# Altium PCB 九键触摸面板-控制板-V2.PcbDoc
Units mm, origin at the board's own origin, x right, y up, seen from the top; angles counter-clockwise.
Board outline 54.4 x 59.2 mm, 2 copper layers (Top Layer, Bottom Layer), stack 1.571 mm thick; 72 components, 76 nets, 247 pads, 180 vias.
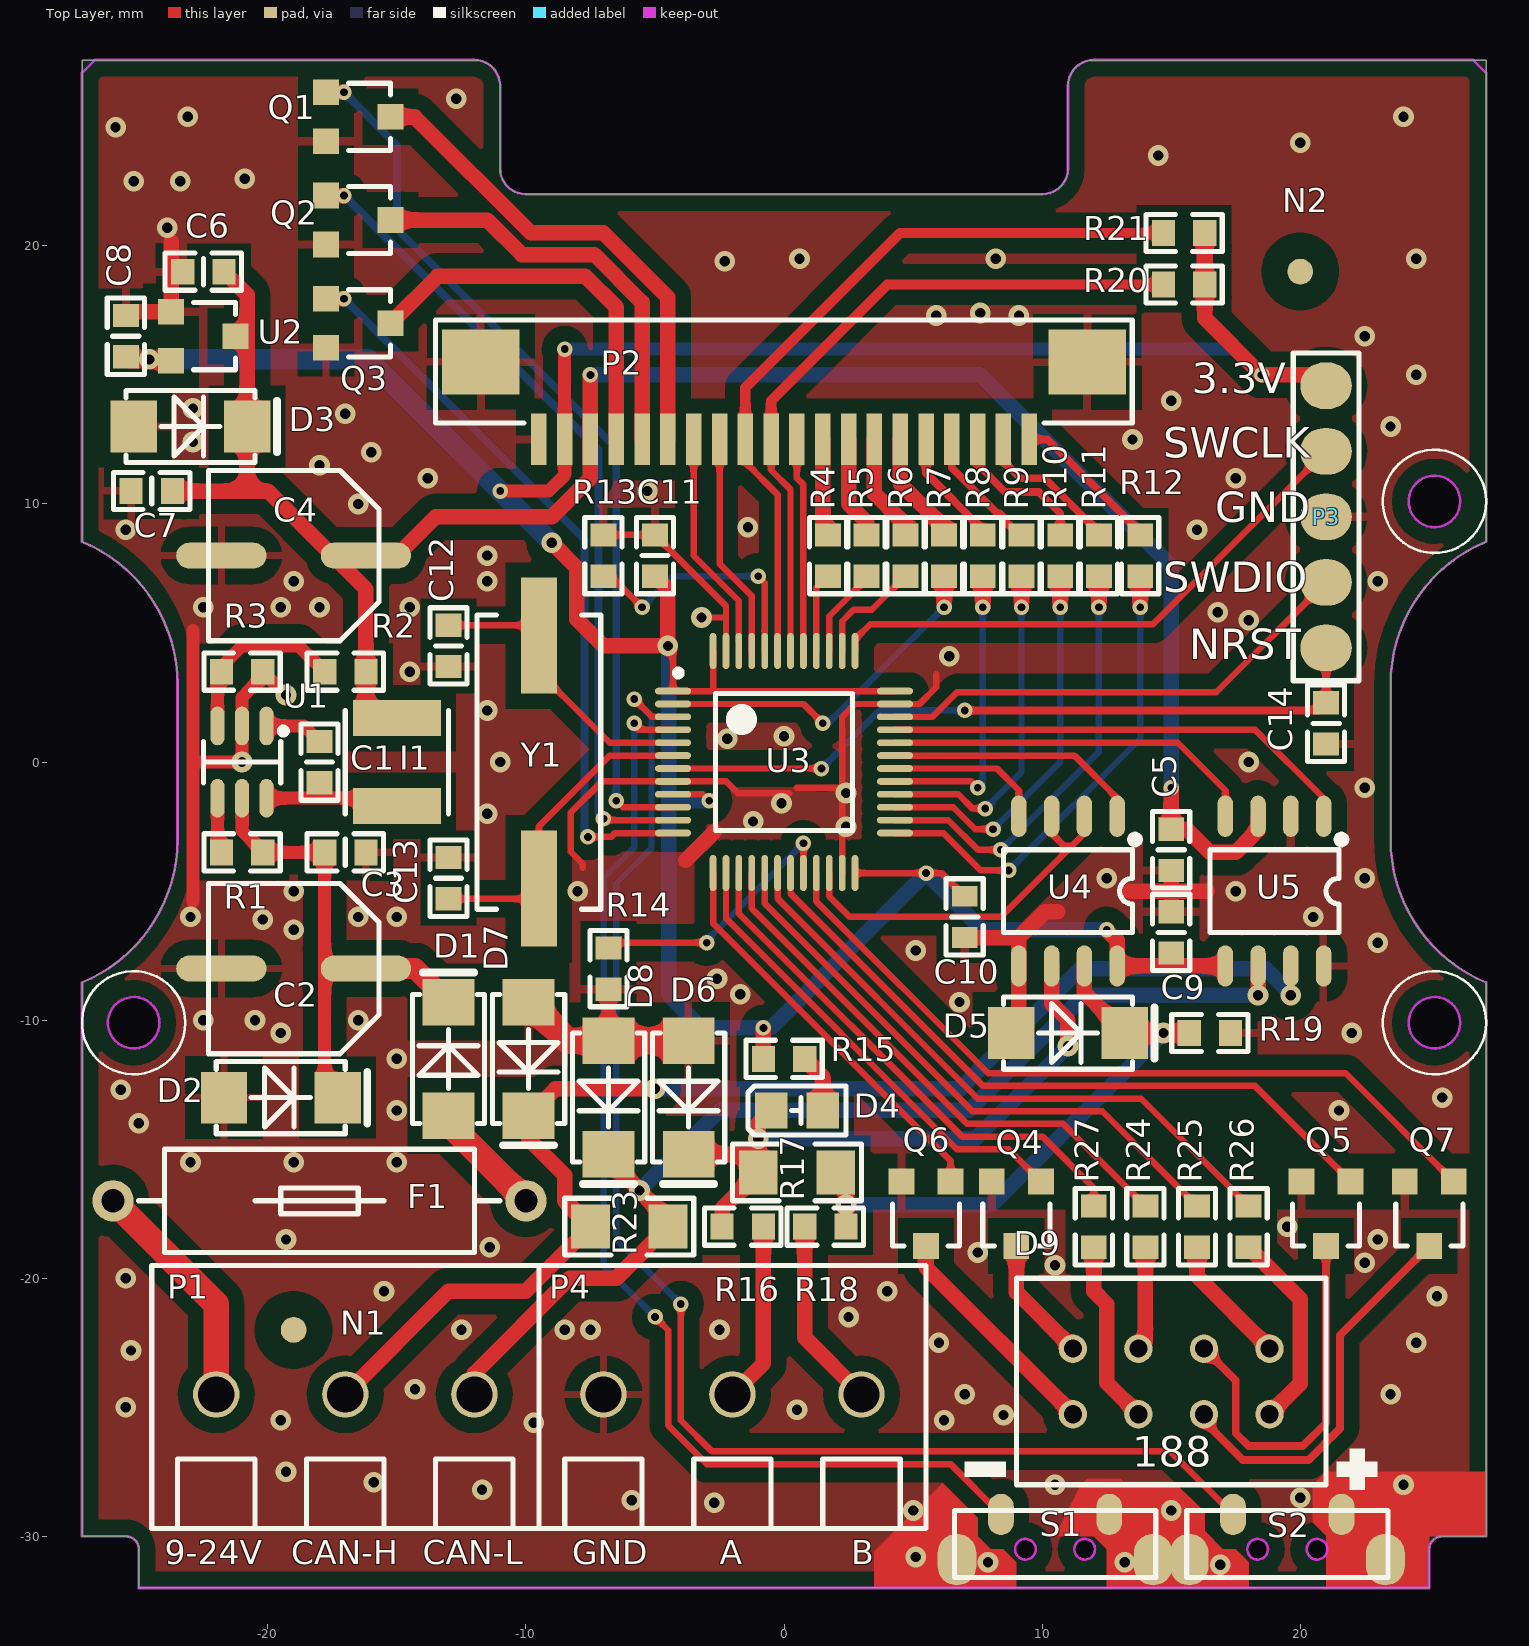
[diagram p0: Top Layer view]
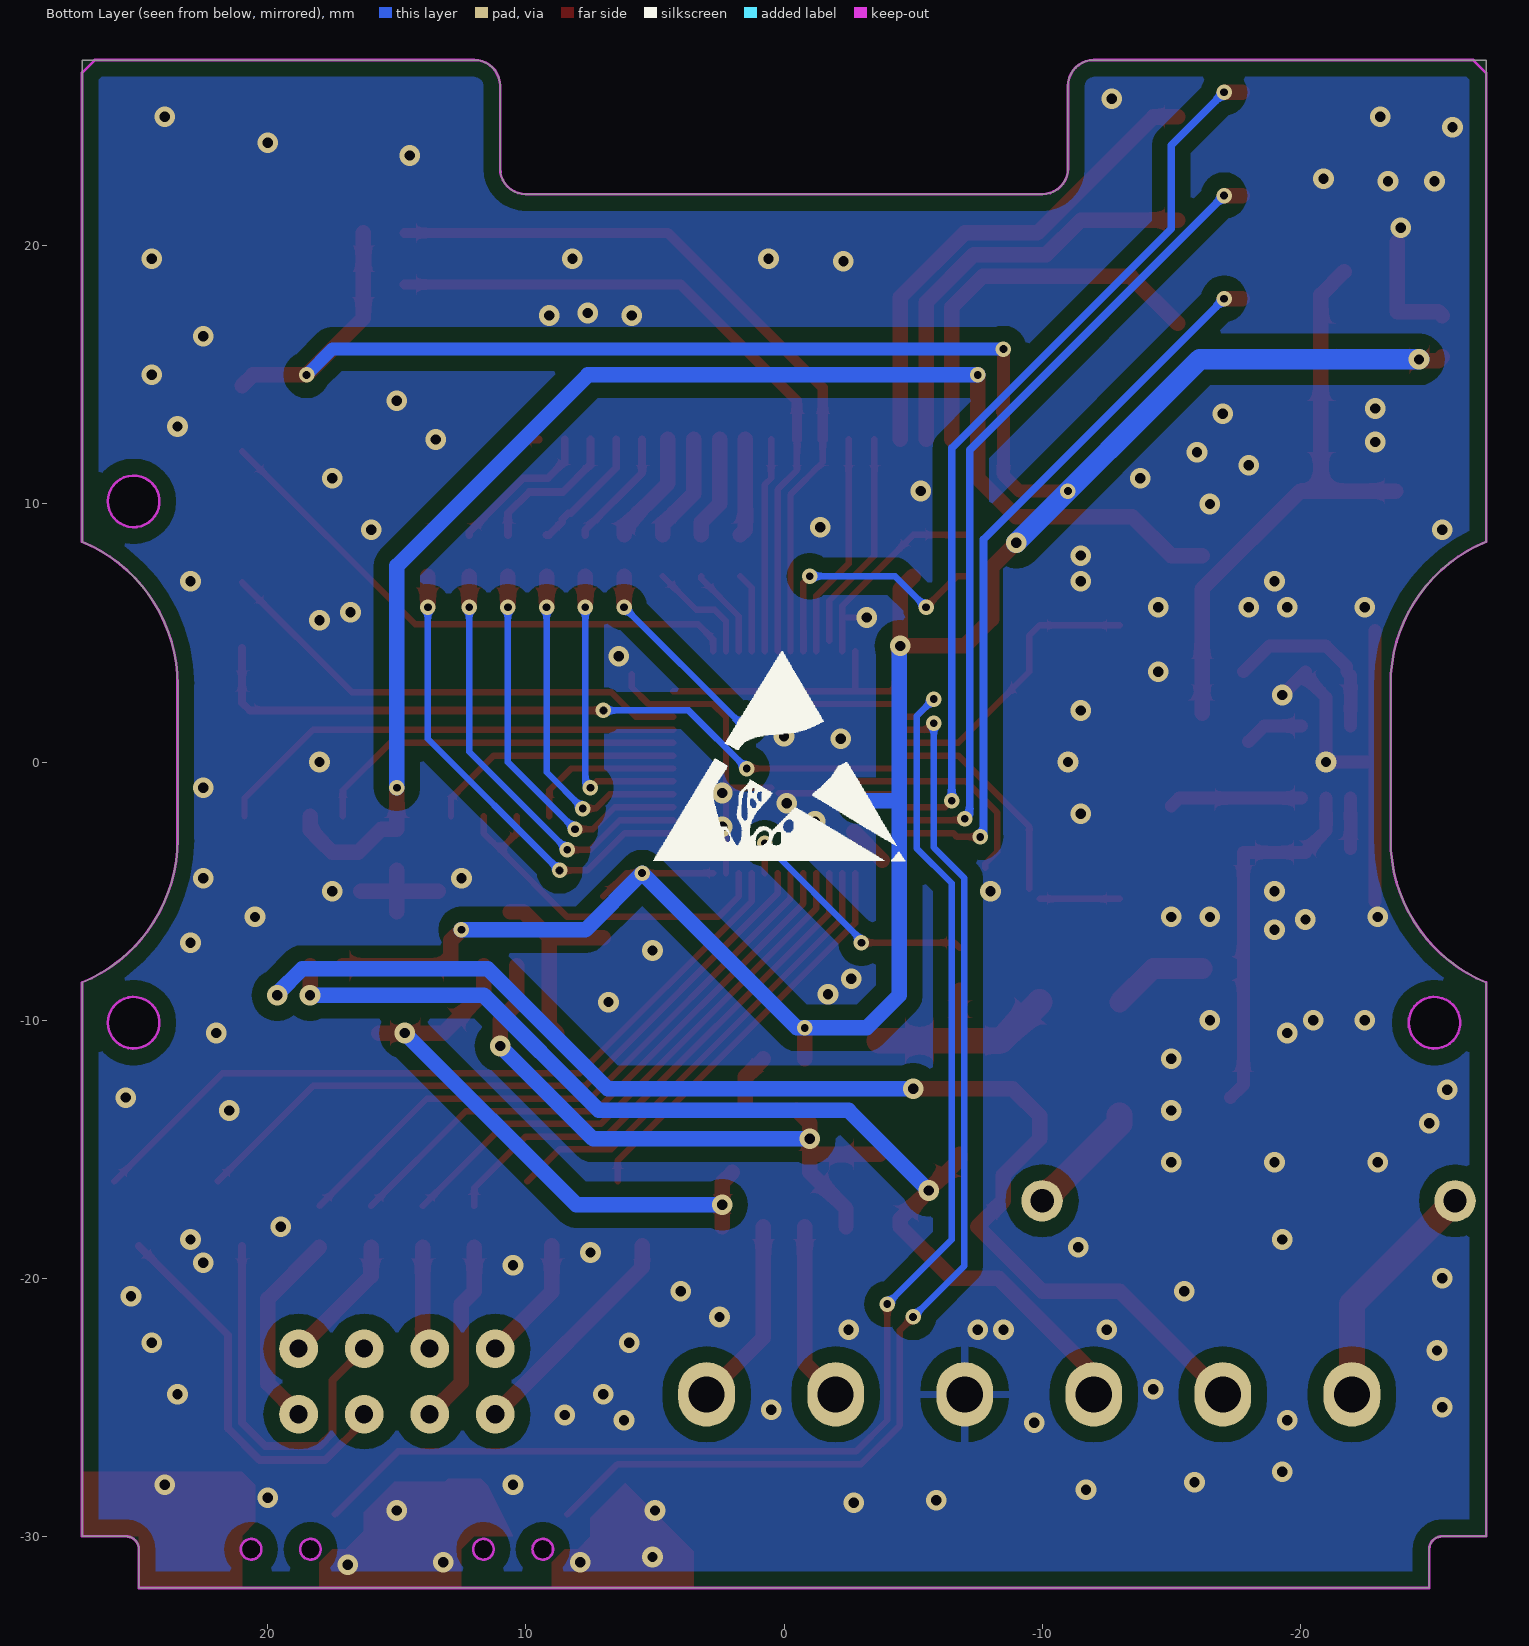
[diagram p1: Bottom Layer view, seen from below]
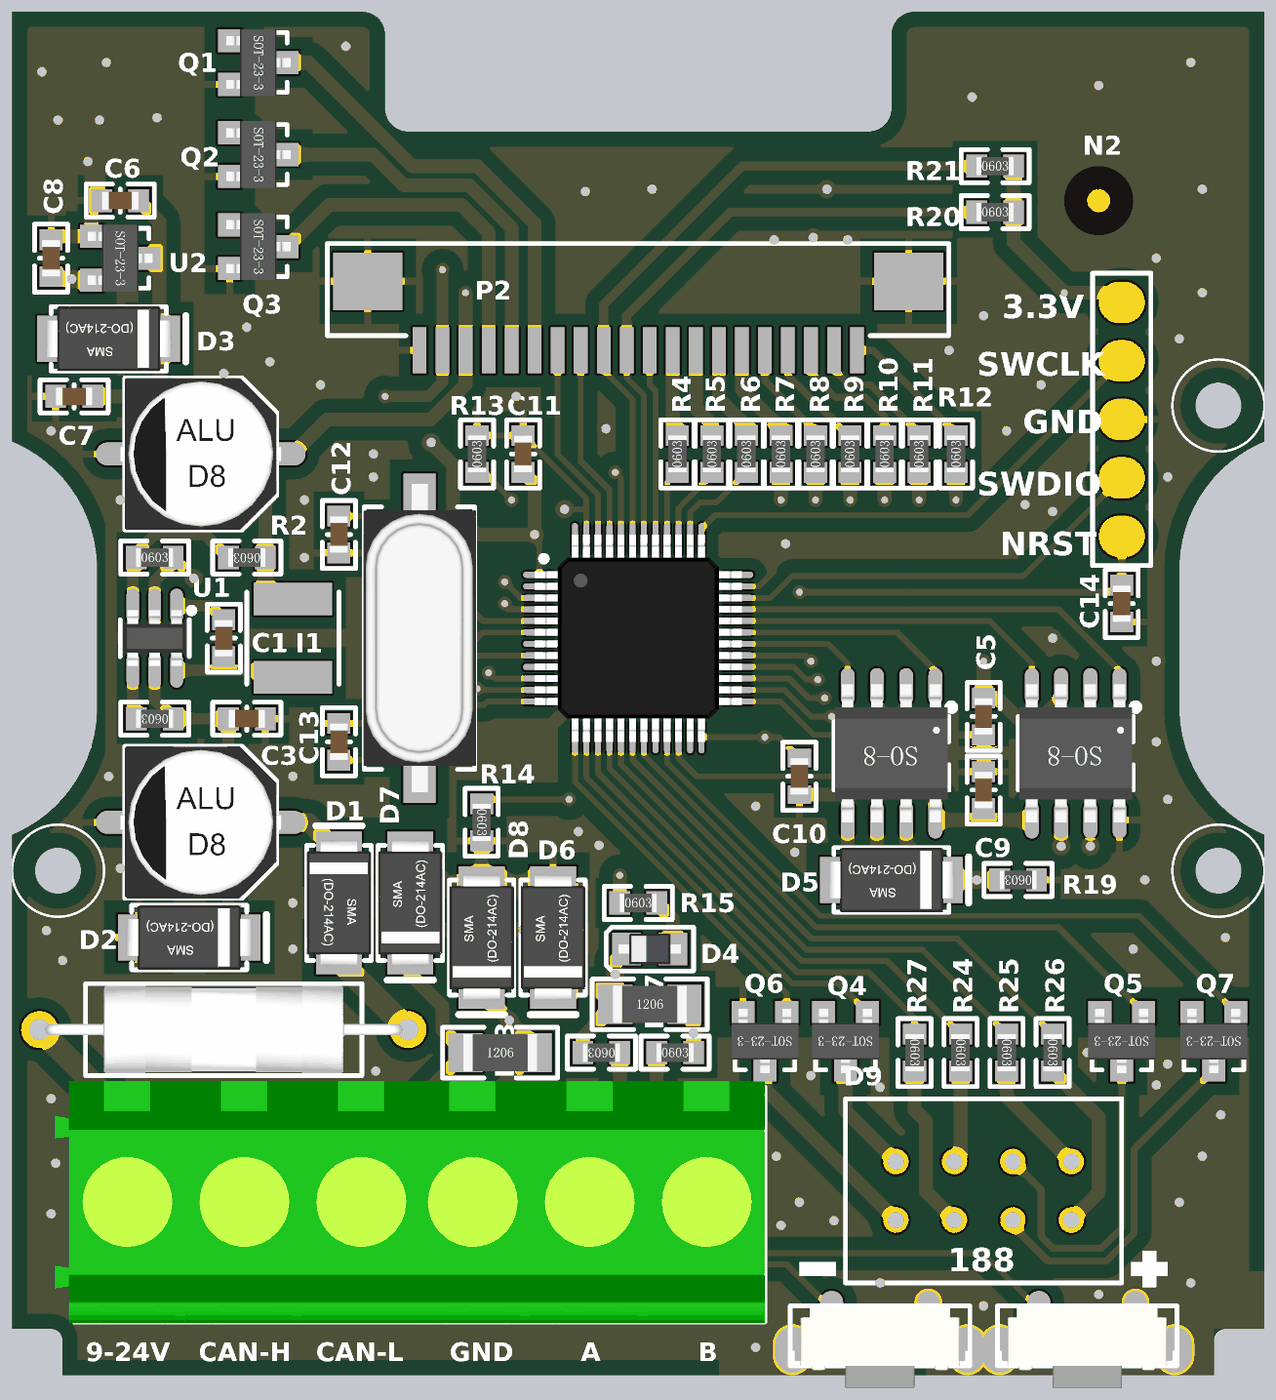
[diagram p2: 3D render of the assembled board from above, using the file's embedded part models]

## Layer stack, top to bottom
Top Solder: solder mask 0.0102, Solder Resist, Dk 3.5
Top Layer: signal copper 0.0356
Dielectric1: dielectric 1.5, FR-4, Dk 4.8
Bottom Layer: signal copper 0.0356
Bottom Solder: solder mask 0.0102, Solder Resist, Dk 3.5

## Board outline
-25,-32 -25,-30.5 ccw(c-25.5,-30.5) -25.5,-30 -27.2,-30 -27.2,-8.541 -27.199,-8.541 ccw(c-29.5,-3) -23.5,-3 -23.5,3 ccw(c-29.5,3) -27.199,8.541 -27.2,8.543 -27.2,27.2 -12,27.2 cw(c-12,26.2) -11,26.2 -11,23 ccw(c-10,23) -10,22 10,22 ccw(c10,23) 11,23 11,26.2 cw(c12,26.2) 12,27.2 27.2,27.2 27.2,8.543 27.199,8.541 ccw(c29.5,3) 23.5,3 23.5,-3 ccw(c29.5,-3) 27.199,-8.541 27.2,-8.541 27.2,-30 25.5,-30 ccw(c25.5,-30.5) 25,-30.5 25,-32
cut-out: 25.2,9.1 cw(c25.2,10.1) 24.2,10.1 cw(c25.2,10.1) 25.2,11.1 cw(c25.2,10.1) 26.2,10.1 cw(c25.2,10.1)
cut-out: 25.2,-11.1 cw(c25.2,-10.1) 24.2,-10.1 cw(c25.2,-10.1) 25.2,-9.1 cw(c25.2,-10.1) 26.2,-10.1 cw(c25.2,-10.1)
cut-out: -25.2,-11.1 cw(c-25.2,-10.1) -26.2,-10.1 cw(c-25.2,-10.1) -25.2,-9.1 cw(c-25.2,-10.1) -24.2,-10.1 cw(c-25.2,-10.1)

## Design rules (kind name [scope] priority, off if disabled: settings)
Clearance Clearance敷铜间隔 [InPolygon] p1: gap=0.6
Clearance Clearance通用间隔 [All] p2: gap=0.24
PlaneConnect [All] p1: planeconnectstyle=Relief reliefexpansion=0.508 reliefentries=4 reliefconductorwidth=0.3 reliefairgap=0.3
PolygonConnect PolygonConnect_过孔 [All vs IsVia] p1: connectstyle=Direct reliefconductorwidth=0.254 reliefentries=4 polygonreliefangle="90 Angle" airgapwidth=0.254
PolygonConnect [All] p2: connectstyle=Relief reliefconductorwidth=0.3 reliefentries=4 polygonreliefangle="90 Angle" airgapwidth=0.6
RoomDefinition 九键触摸面板-控制板-V2 [InComponentClass('九键触摸面板-控制板-V2')] p1: confinementstyle=ConfineIn formatcopy=TRUE lockcomponents=FALSE outline -227.312,-319.616 -176.512,-319.616 -176.512,-294.216 -227.312,-294.216
RoutingVias [All] p1: holewidth=0.5 width=1 viastyle="Through Hole" minholewidth=0.4 minwidth=0.8 maxholewidth=10 maxwidth=10
SolderMaskExpansion [All] p1: expansion=0.102
Width [All] p1: maxlimit=10 minlimit=0.25 preferedwidth=0.5
29 further rules are at their usual default settings.

## Components (designator, comment, footprint, x,y, rotation, side; value= is the part's Value field where it differs from the comment)
C1 "104" C-0603#1 -18,0 r90 top
C2 "100UF/35V" 贴片固态电容6.3*7.7 -19,-8 r180 top
C3 "104" C-0603#1 -17,-3.5 r180 top
C4 "470UF/10V" 贴片固态电容6.3*7.7 -19,8 r180 top
C5 "104" C-0603#1 15,-3.4 r90 top
C6 "106" C-0603#1 -22.5,19 r0 top
C7 "224" C-0603#1 -24.5,10.5 r0 top
C8 "226" C-0603#1 -25.5,16.5 r270 top
C9 "104" C-0603#1 15,-6.6 r270 top
C10 "104" C-0603#2 7,-6 r90 top
C11 "104" C-0603#1 -5,8 r270 top
C12 "20P" C-0603#1 -13,4.5 r90 top
C13 "20P" C-0603#1 -13,-4.5 r270 top
C14 "104" C-0603#1 21,1.5 r90 top
D1 "M7" SMA -13,-11.5 r270 top
D2 "SMAJ30A" SMA -19.5,-13 r180 top
D3 "SMAJ5.0A" SMA -23,13 r180 top
D4 "SS12" SOD-323/0805 0.5,-13.5 r0 top
D5 "SMAJ5.0A" SMA 11,-10.5 r180 top
D6 "SMAJ5.0A" SMA -3.7,-13 r90 top
D7 "SMAJ5.0A" SMA -9.9,-11.5 r90 top
D8 "SMAJ5.0A" SMA -6.8,-13 r90 top
D9 "2位半数码管" 2位半0.25英寸 15,-24 r0 top
F1 "F0.5A" FUSE-3*10带引线 -18,-17 r0 top
I1 "10uH" 4030 -15,0 r90 top
N1 "光学定位点" MARK-1mm-3mm -19,-22 r0 top
N2 "光学定位点" MARK-1mm-3mm 20,19 r0 top
P1 "" KF128-3P -17,-24.5 r0 top
P2 "FPC-1.0-20P" FPC-1.0mm_20P下接翻盖 0,14 r0 top
P3 "ST-LINK" 5P下载口 21,9.5 r270 top
P4 "" KF128-3P -2,-24.5 r0 top
Q1 "2N7002" SOT-23 -16.5,25 r180 top
Q2 "2N7002" SOT-23 -16.5,21 r180 top
Q3 "2N7002" SOT-23 -16.5,17 r180 top
Q4 "2N7002" SOT-23 9,-17.5 r90 top
Q5 "2N7002" SOT-23 21,-17.5 r90 top
Q6 "2N7002" SOT-23 5.5,-17.5 r90 top
Q7 "2N7002" SOT-23 25,-17.5 r90 top
R1 "100K" R-0603 -21,-3.5 r180 top
R2 "11K" R-0603 -17,3.5 r180 top
R3 "2.1K" R-0603 -21,3.5 r0 top
R4 "100" R-0603 1.7,8 r90 top
R5 "100" R-0603 3.2,8 r90 top
R6 "100" R-0603 4.7,8 r90 top
R7 "100" R-0603 6.2,8 r90 top
R8 "100" R-0603 7.7,8 r90 top
R9 "100" R-0603 9.2,8 r90 top
R10 "100" R-0603 10.7,8 r90 top
R11 "100" R-0603 12.2,8 r90 top
R12 "100" R-0603 13.8,8 r90 top
R13 "10K" R-0603 -7,8 r90 top
R14 "10K" R-0603 -6.8,-8 r270 top
R15 "1K" R-0603 0,-11.5 r0 top
R16 "10" R-0603 -1.6,-18 r180 top
R17 "1K" R-1206 0.5,-15.9 r0 top
R18 "10" R-0603 1.6,-18 r0 top
R19 "1K" R-0603 16.5,-10.5 r180 top
R20 "10K" R-0603 15.5,18.5 r0 top
R21 "10K" R-0603 15.5,20.5 r0 top
R23 "120" R-1206 -6,-18 r0 top
R24 "100" R-0603 14,-18 r270 top
R25 "100" R-0603 16,-18 r270 top
R26 "100" R-0603 18,-18 r270 top
R27 "100" R-0603 12,-18 r270 top
S1 "SB-6*6*5" SB-3*6*3.5 10.5,-30.5 r0 top
S2 "SB-6*6*5" SB-3*6*3.5 19.5,-30.5 r0 top
U1 "BL9341" SOT-23-6-m -21,0 r90 top
U2 "ME6206A33M3G" SOT-23 -22.5,16.5 r180 top
U3 "GD32F103C8T6" LQFP48-L 0,0 r270 top
U4 "TP8485E-SR" SOP-8-m 11,-5 r180 top
U5 "TJA1051T/3" SOP-8-M 19,-5 r180 top
Y1 "8M" HC-49SMD -9.5,0 r90 top

## Footprints (in the part's own frame and the unit in brackets; to place one, negate y for a bottom-side part, rotate by r counter-clockwise, add the part's x,y. Pads: shape width x height; smd on the part's side, far side on the other; paste and mask are expansions set on the pad)
2位半0.25英寸 [mm]
  round 1.1 / inner round 1.1 / far side round 1.5 hole 0.7: 1(-3.81,-1.27) 2(-1.27,-1.27) 3(1.27,-1.27) 4(3.81,-1.27) 5(3.81,1.27) 6(1.27,1.27) 7(-1.27,1.27) 8(-3.81,1.27)
  silkscreen extent -6,-4 6,4, body extent -6,-4 6,4, height 4
5P下载口 [mm]
  oval 1.8x2 smd paste-1: 1(-5.08,0) 2(-2.54,0) 3(0,0) 4(2.54,0) 5(5.08,0)
  silkscreen extent -6.35,-1.27 6.35,1.27
4030 [mm]
  rect 1.4x3.4 smd: 1(-1.7,0) 2(1.7,0)
  silkscreen extent -2,-2 2,2, body extent -2,-2 2,2, height 3
C-0603#1 [mm]
  rect 0.9x1 smd: 1(-0.8,0) 2(0.8,0)
  silkscreen extent -1.48,-0.72 1.48,0.72, body extent -0.8,-0.4 0.8,0.4, height 0.6
C-0603#2 [mm]
  rect 0.8x1 smd: 1(-0.8,0) 2(0.8,0)
  silkscreen extent -1.48,-0.72 1.48,0.72, body extent -0.8,-0.4 0.8,0.4, height 0.6
FPC-1.0mm_20P下接翻盖 [mm]
  rect 0.6x2 smd: 1(-9.5,-1.5) 2(-8.5,-1.5) 3(-7.5,-1.5) 4(-6.5,-1.5) 5(-5.5,-1.5) 6(-4.5,-1.5) 7(-3.5,-1.5) 8(-2.5,-1.5) 9(-1.5,-1.5) 10(-0.5,-1.5) 11(0.5,-1.5) 12(1.5,-1.5) 13(2.5,-1.5) 14(3.5,-1.5) 15(4.5,-1.5) 16(5.5,-1.5) 17(6.5,-1.5) 18(7.5,-1.5) 19(8.5,-1.5) 20(9.5,-1.5)
  rect 3x2.5 smd: 21(11.75,1.5) 22(-11.75,1.5)
  silkscreen extent -13.51,-0.86 13.49,3.13
FUSE-3*10带引线 [mm]
  round 1.6 hole 0.9: 1(-8,0) 2(8,0)
  silkscreen extent -7,-2 7,2, body extent -7.75,-1.9 7.75,1.9, height 4.1
HC-49SMD [mm]
  rect 4.5x1.4 smd: 1(-4.9,0) 2(4.9,0)
  silkscreen extent -5.7,-2.4 5.7,2.4, body extent -6.7,-2.46 6.7,2.44, height 4
KF128-3P [mm]
  round 1.8 / inner round 1.8 / far side oval 2.2x2.5 hole 1.4: 1(-5,0) 2(0,0) 3(5,0)
  silkscreen extent -7.5,-5.2 7.5,5, body extent -8.34,-5.25 7.5,5.25, height 14.35
LQFP48-L [mm]
  oval 0.26x1.4 smd: 1(-2.75,-4.3) 2(-2.25,-4.3) 3(-1.75,-4.3) 4(-1.25,-4.3) 5(-0.75,-4.3) 6(-0.25,-4.3) 7(0.25,-4.3) 8(0.75,-4.3) 9(1.25,-4.3) 10(1.75,-4.3) 11(2.25,-4.3) 12(2.75,-4.3) 25(2.75,4.3) 26(2.25,4.3) 27(1.75,4.3) 28(1.25,4.3) 29(0.75,4.3) 30(0.25,4.3) 31(-0.25,4.3) 32(-0.75,4.3) 33(-1.25,4.3) 34(-1.75,4.3) 35(-2.25,4.3) 36(-2.75,4.3)
  oval 1.4x0.26 smd: 13(4.3,-2.75) 14(4.3,-2.25) 15(4.3,-1.75) 16(4.3,-1.25) 17(4.3,-0.75) 18(4.3,-0.25) 19(4.3,0.25) 20(4.3,0.75) 21(4.3,1.25) 22(4.3,1.75) 23(4.3,2.25) 24(4.3,2.75) 37(-4.3,2.75) 38(-4.3,2.25) 39(-4.3,1.75) 40(-4.3,1.25) 41(-4.3,0.75) 42(-4.3,0.25) 43(-4.3,-0.25) 44(-4.3,-0.75) 45(-4.3,-1.25) 46(-4.3,-1.75) 47(-4.3,-2.25) 48(-4.3,-2.75)
  silkscreen extent -3.57,-4.22 2.65,2.65, body extent -4.5,-4.5 4.5,4.5, height 1.5
MARK-1mm-3mm [mm]
  round 1 smd paste-0.6 mask+1: 1(0,0)
  Top Layer pour cut-out: -1.5,0 -1.386,-0.574 -1.061,-1.061 -0.574,-1.386 0,-1.5 0,-1.5 0.574,-1.386 1.061,-1.061 1.386,-0.574 1.5,0 1.5,0 1.386,0.574 1.061,1.061 0.574,1.386 0,1.5 0,1.5 -0.574,1.386 -1.061,1.061 -1.386,0.574 -1.5,0
R-0603 [mm]
  rect 0.9x1 smd: 1(-0.8,0) 2(0.8,0)
  silkscreen extent -1.48,-0.72 1.48,0.72, body extent -0.8,-0.4 0.8,0.4, height 0.45
R-1206 [mm]
  rect 1.5x1.7 smd: 1(-1.5,0) 2(1.5,0)
  silkscreen extent -2.5,-1.1 2.5,1.1, body extent -1.6,-0.8 1.6,0.8, height 0.6
SB-3*6*3.5 [mm]
  oval 1x1.6 smd: 1(-2.1,1.35) 2(2.1,1.35)
  oval 1.5x2 smd: 3(-3.8,-0.4) 3(3.8,-0.4)
  Keep-Out Layer circle w0.1: c1.15,0 r0.4
  Keep-Out Layer circle w0.1: c-1.15,0 r0.4
  Keep-Out Layer board cut-out: 1.15,-0.4 0.997,-0.37 0.867,-0.283 0.78,-0.153 0.75,0 0.75,0 0.78,0.153 0.867,0.283 0.997,0.37 1.15,0.4 1.15,0.4 1.303,0.37 1.433,0.283 1.52,0.153 1.55,0 1.55,0 1.52,-0.153 1.433,-0.283 1.303,-0.37 1.15,-0.4
  Keep-Out Layer board cut-out: -1.15,-0.4 -1.303,-0.37 -1.433,-0.283 -1.52,-0.153 -1.55,0 -1.55,0 -1.52,0.153 -1.433,0.283 -1.303,0.37 -1.15,0.4 -1.15,0.4 -0.997,0.37 -0.867,0.283 -0.78,0.153 -0.75,0 -0.75,0 -0.78,-0.153 -0.867,-0.283 -0.997,-0.37 -1.15,-0.4
  silkscreen extent -3.9,-1.1 3.9,1.5, body extent -3.9,-2.1 3.9,1.5, height 3.5
SMA [mm]
  rect 1.8x2 smd: 1(2.2,0) 2(-2.2,0)
  silkscreen extent -3.35,-1.4 2.5,1.4, body extent -2.75,-1.4 2.75,1.4, height 2.6
SOD-323/0805 [mm]
  rect 1.25x1.4 smd: 1(1,0) 2(-1,0)
  silkscreen extent -1.9,-0.95 1.9,0.95, body extent -1.35,-0.68 1.35,0.67, height 0.79
SOP-8-m [mm]
  oval 0.6x1.6 smd: 1(-1.905,-2.9) 2(-0.635,-2.9) 3(0.635,-2.9) 4(1.905,-2.9) 5(1.905,2.9) 6(0.635,2.9) 7(-0.635,2.9) 8(-1.905,2.9)
  silkscreen extent -2.89,-2.3 2.5,1.6, body extent -2.45,-3 2.45,3, height 1.7
SOP-8-M [mm]
  oval 0.6x1.6 smd: 1(-1.905,-2.9) 2(-0.635,-2.9) 3(0.635,-2.9) 4(1.905,-2.9) 5(1.905,2.9) 6(0.635,2.9) 7(-0.635,2.9) 8(-1.905,2.9)
  silkscreen extent -2.89,-2.3 2.5,1.6, body extent -2.45,-3 2.45,3, height 1.7
SOT-23 [mm]
  rect 1x1 smd: 1(1.25,-0.95) 2(1.25,0.95) 3(-1.25,0)
  silkscreen extent -1.25,-1.3 0.38,1.3, body extent -1.4,-1.45 1.4,1.45, height 1.2
SOT-23-6-m [mm]
  oval 1.5x0.55 smd: 1(1.4,-0.95) 2(1.4,0) 3(1.4,0.95) 4(-1.4,0.95) 5(-1.4,0) 6(-1.4,-0.95)
  silkscreen extent -0.8,-1.7 1.3,1.5, body extent -1.21,-1.4 1.21,1.4, height 1.08
贴片固态电容6.3*7.7 [mm]
  oval 3.5x1 smd: 1(-2.8,0) 2(2.8,0)
  silkscreen extent -3.3,-3.3 3.3,3.3, body extent -3.5,-3.3 3.5,3.3, height 7.71

## Part data
C1 C3 C5 C6 C7 C8 C9 C10 C11: library part Cap, "Capacitor"
C2 C4: library part "Cap Pol1", "Polarized Capacitor (Radial)"
C12 C13 C14: library part Cap-0603, "0805"
D1: "SMA"
D2 D3 D5 D6 D7 D8: library part TVS-1, "SMB"
D4: library part SS14, "SMA"
F1: library part "Fuse 1", "Fuse"
I1: library part Inductance3
N1 N2: library part 无引脚
P1 P4: library part "Header 3", "Header, 3-Pin"
P2: library part "Header 22", "Header, 22-Pin"
P3: library part ST-LINK-STM32
R1 R2 R3 R4 R5 R6 R7 R8 R9 R10 R11 R12 R13 R14 R20 R21 R24 R25 R26 R27: library part Res2-0603, "0603"
R15 R16 R17 R18 R19 R23: library part Res2, "Resistor"
U2: "LDO稳压 SOT-23"
U4: library part MAX3082, "RS485总线转串口"
Y1: library part 晶振

## Via types
v1: diameter 0.8, hole 0.4, Top Layer to Bottom Layer, tented both sides, 143 vias
v2: diameter 0.6, hole 0.3, Top Layer to Bottom Layer, tented both sides, 37 vias

## Nets (pads, with @x,y where several pads share a name; then routed paths per layer and width w, separated by ;. In a path a pad name is that pad's centre, name@x,y a point inside that pad or via, vN(x,y) a via of type N, cw(c..) or ccw(c..) an arc to the next point about the centre after c; other vN are vias at no path point)
3.3V: C8.2 C9.2 C10.2 C11.2 P2.2 P3.1 R15.1 R20.2 R21.2 U2.2 U3.1 U3.9 U3.24 U3.36 U3.48 U4.8 U5.5 | length 135.7
  Top Layer w0.25: v1(-4.5,4.5) -4.3,4.3 U3.1 U3.36 ; U3.9 -3.15,-1.25 v2(-2.9,-1.5) ; -2.75,2.8 U3.48 ; U3.24 v2(5.5,-4.3) 6.1,-4.3 C10.2
  Top Layer w0.5: v2(-11,10.5) -9.117,10.5 -8.5,11.117 P2.2 v2(-8.5,16)
  Top Layer w0.6: C8.2 -25.35,15.55 U2.2 ; v1(-9,8.5) -8.04,7.54 -8.04,5.54 -7,4.5 v1(-4.5,4.5) -4.5,6.7 C11.2 ; R15.1 v2(-0.8,-10.3) ; v2(12.5,-6.5) 12.905,-6.905 U4.8 U5.5 ; R21.2 R20.2 16.3,17.2 v2(18.5,15) 20.58,15 P3.1
  Bottom Layer w0.5: v2(-8.5,16) 17.5,16 v2(18.5,15)
  Bottom Layer w0.6: v1(-4.5,4.5) -4.47,4.47 -4.47,-1.5 ; v2(-2.9,-1.5) -4.47,-1.5 ; v2(12.5,-6.5) 7.7,-6.5 v2(5.5,-4.3) -0.5,-10.3 v2(-0.8,-10.3) -3.2,-10.3 -4.47,-9.03 -4.47,-1.5
  Bottom Layer w0.8: v1(-24.6,15.6) -16.1,15.6 v1(-9,8.5)
5V: C4.1 C5.2 C6.2 C7.2 D3.2 I1.2 P2.3 R2.1 U2.3 U5.3 | length 77.1
  Top Layer w0.6: C7.2 -20.8,10.5 ; C6.2 -20.8,18.1 D3.2 -20.8,10.5 ; I1.2@-16.2,1.9 -16.2,6.7 -20,10.5 -20.8,10.5 ; C4.1 -15,8 -13.5,9.5 -9,9.5 -7.5,11 P2.3 v2(-7.5,15) ; v2(15,-1) C5.2 15.6,-2.6 16.5,-3.5 17.5,-3.5 18.365,-2.635 U5.3
  Bottom Layer w0.6: v2(-7.5,15) 7.6,15 15,7.6 v2(15,-1)
24V: F1.1 P1.1 | length 9.2
  Top Layer w1: F1.1 -22,-21 P1.1
485-A: P4.2 R16.1 | length 7
  Top Layer w0.6: P4.2 -0.8,-23.3 R16.1
485-B: P4.3 R18.1 | length 7.4
  Top Layer w0.6: R18.1 0.8,-22.3 P4.3
485-RE/DE: U3.22 U4.2 U4.3 | length 14.7
  Top Layer w0.25: U3.22 1.75,-5.206 2.544,-6 8.4,-6 11,-3.4 ; U4.3 10.365,-2.765 11,-3.4 ; U4.2 11.635,-2.765 11,-3.4
485-RXD: U3.31 U4.1 | length 10
  Top Layer w0.25: U3.31 11.25,0.25 12.905,-1.405 U4.1
485-TXD: U3.30 U4.4 | length 6.2
  Top Layer w0.25: U3.30 8.25,-0.25 9.095,-1.095 U4.4
A/F: R24.1 U3.16 | length 21.4
  Top Layer w0.25: U3.16 -1.25,-5.671 7.099,-14.02 10.82,-14.02 R24.1
B: P2.6 Q1.3 | length 19.1
  Top Layer w0.6: Q1.3 -14.312,25 -9.812,20.5 -7,20.5 -4.5,18 P2.6
B/G: R25.1 U3.17 | length 22.8
  Top Layer w0.25: U3.17 -0.75,-5.478 7.302,-13.53 12.33,-13.53 R25.1
C/E: R26.1 U3.18 | length 24.2
  Top Layer w0.25: U3.18 -0.25,-5.285 7.505,-13.04 13.84,-13.04 R26.1
CAN-H: D7.2 P1.2 R23.1 U5.7 | length 49.8
  Top Layer w0.6: P1.2 -13,-20.5 -10,-20.5 R23.1 -8.5,-17 -8.5,-16 -9.9,-14.6 D7.2 -8.86,-12.66 v1(-5,-12.66)
  Bottom Layer w0.6: v1(-5,-12.66) 6.823,-12.66 11.483,-8 18.659,-8 19.635,-8.976 v1(19.635,-9.035)
CAN-L: D8.2 P1.3 R23.2 U5.6 | length 42.7
  Top Layer w0.6: P1.3 -12,-23.688 -8.312,-20 -6.5,-20 R23.2 -4.5,-17.7 -6.8,-15.4 D8.2 ; v1(18.365,-9.035) U5.6
  Bottom Layer w0.6: v1(-5.6,-16.6) -2.5,-13.5 7.171,-13.5 11.636,-9.035 v1(18.365,-9.035)
CAN-RXD: U3.32 U5.4 | length 14.6
  Top Layer w0.25: U3.32 15.25,0.75 17.095,-1.095 U5.4
CAN-TXD: U3.33 U5.1 | length 18.4
  Top Layer w0.25: U3.33 18.25,1.25 20.905,-1.405 U5.1
COM1: P2.20 R12.2 | length 5.9
  Top Layer w0.3: P2.20 10.2,12.5 13.8,8.9 R12.2
COM2: P2.12 R4.2 | length 3.8
  Top Layer w0.6: P2.12 1.5,9 R4.2
COM3: P2.13 R5.2 | length 4
  Top Layer w0.6: P2.13 2.5,10 3.2,9.3 R5.2
COM4: P2.19 R11.2 | length 5.8
  Top Layer w0.3: P2.19 8.5,11.648 9.148,11 10.1,11 12.2,8.9 R11.2
COM5: P2.15 R7.2 | length 4.4
  Top Layer w0.6: P2.15 4.5,10.8 6.2,9.1 R7.2
COM6: P2.14 R6.2 | length 4.2
  Top Layer w0.6: P2.14 3.5,10.4 4.7,9.2 R6.2
COM7: P2.18 R10.2 | length 5.8
  Top Layer w0.3: P2.18 7.5,11.534 8.574,10.46 9.876,10.46 10.7,9.636 R10.2
COM8: P2.17 R9.2 | length 4.9
  Top Layer w0.3: P2.17 6.5,11.4 8.26,9.64 8.362,9.64 8.59,9.412 8.59,9.31 9.1,8.8 R9.2
COM9: P2.16 R8.2 | length 4.6
  Top Layer w0.3: P2.16 5.5,11.2 7.7,9 R8.2
D/1C/1B: R27.1 U3.15 | length 20.4
  Top Layer w0.25: U3.15 -1.75,-5.864 6.896,-14.51 10.01,-14.51 12,-16.5 R27.1
DIG1: Q4.1 U3.14 | length 18.2
  Top Layer w0.25: U3.14 -2.25,-6.057 6.693,-15 8.7,-15 Q4.1
DIG2: Q5.1 U3.19 | length 27.1
  Top Layer w0.25: U3.19 0.25,-5.092 7.708,-12.55 18.25,-12.55 Q5.1
DIG3: Q6.1 U3.13 | length 15.8
  Top Layer w0.25: U3.13 -2.75,-6.25 6.45,-15.45 Q6.1
DIG4: Q7.1 U3.21 | length 30.3
  Top Layer w0.25: U3.21 1.25,-5.399 7.911,-12.06 21.76,-12.06 Q7.1
G: P2.5 Q2.3 | length 16.4
  Top Layer w0.6: Q2.3 -11.5,21 -10.16,19.66 -7.348,19.66 -5.5,17.812 P2.5
GND: C2.2 C3.1 C4.2 C5.1 C6.1 C7.1 C8.1 C9.1 C10.1 C11.1 C12.1 C13.1 C14.1 D2.1 D3.1 D5.1 D6.1 D7.1 D8.1 P2.1 P2.21 P2.22 P3.3 P4.1 Q1.2 Q2.2 Q3.2 Q4.2 Q5.2 Q6.2 Q7.2 R3.2 R13.2 R14.2 R19.1 S1.2 S1.3 S2.2 S2.3 U1.2 U2.1 U3.8 U3.23 U3.35 U3.47 U4.5 U5.2 U5.8 | length 77.3
  Top Layer w0.25: -7.8,-4.1 -7.8,-3.94 -8.265,-3.475 -8.265,-1.958 -7.057,-0.75 U3.8 -2.244,-0.75 -1.794,-1.2 0.2,-1.2 ; R13.2 C11.1 -2.25,6.05 -2.25,5.6 ; v1(-3.2,5.6) -2.25,5.6 ; U3.47 -2.25,5.6 ; 0.5,-1 v1@2.25,-1 ; U3.23 v1@2.25,-1 ; 5.9,3.4 5.9,2.9 5.25,2.25 U3.35 2.75,2.25 2.25,1.75 v1@2.25,-1
  Top Layer w0.5: -22.9,-5.4 -22.9,0 -22.9,5.1 ; -22.9,0 v1(-21,0) U1.2 ; U1.2 -21,2.5 -20.2,3.3 R3.2 v1(-19.3,2.6) ; D8.1 R14.2
  Top Layer w0.6: C8.1 -25.35,17.45 U2.1 -23.75,20.15 ; -3.8,-3.8 -2.7,-2.7 ; C10.1 9.09,-6.8 9.095,-6.805 ; D5.1 9.095,-10.205 U4.5 9.095,-6.805 ; 10.6,-5.8 10.1,-5.8 9.095,-6.805 ; 13.4,-5 15,-5 ; C9.1 15,-5 ; C5.1 15,-5 ; 16.4,-5 15,-5
  Top Layer w1: D7.1 -8.4,-10.8 D8.1 D6.1
  other v1: 16.9,-31.1 7.9,-31 13.2,-31 5.1,-30.8 5,-29 15,-29 -2.7,-28.7 -5.9,-28.6 20,-28.5 -11.7,-28.2 10.5,-28 24,-28 -15.9,-27.9 -19.3,-27.5 -9.7,-25.6 -19.5,-25.5 6.2,-25.5 8.5,-25.3 0.5,-25.1 -25.5,-25 7,-24.5 23.5,-24.5 -14.3,-24.3 -25.3,-22.8 6,-22.5 24.5,-22.5 -12.5,-22 -8.5,-22 -7.5,-22 -2.5,-22 2.5,-21.5 25.3,-20.7 -15.5,-20.5 4,-20.5 -25.5,-20 10.5,-19.5 22.5,-19.4 7.5,-19 -11.4,-18.8 -19.3,-18.5 23,-18.5 19.5,-18 -23,-15.5 -19,-15.5 -15,-15.5 -25,-14 -15,-13.5 21.5,-13.5 25.5,-13 -25.7,-12.7 -15,-11.5 -19.5,-10.5 22,-10.5 -22.5,-10 -20.5,-10 -16.5,-10 6.8,-9.3 -1.7,-9 -2.6,-8.4 5.1,-7.3 23,-7 -19,-6.5 -20.2,-6.1 -23,-6 -16.5,-6 -15,-6 20.5,-6 -19,-5 -8,-5 17.5,-5 12.5,-4.5 22.5,-4.5 2.4,-2.5 -1.2,-2.3 -11.5,-2 -0.1,-1.6 2.4,-1.2 22.5,-1 -11,0 18,0 -2.2,0.9 0,1 -11.5,2 -14.5,3.5 6.4,4.1 18,5.5 16.8,5.8 -22.5,6 -19.5,6 -18,6 -14.5,6 -19,7 -11.5,7 23,7 -11.5,8 -25.5,9 16,9 -1.4,9.1 -16.5,10 -5.3,10.5 -13.8,11 17.5,11 -18,11.5 -16,12 -22.9,12.4 13.5,12.5 23.5,13 -17,13.5 -22.9,13.7 15,14 24.5,15 22.5,16.5 5.9,17.3 9.1,17.3 7.6,17.4 -2.3,19.4 0.6,19.5 8.2,19.5 24.5,19.5 -23.9,20.7 -25.2,22.5 -23.4,22.5 -20.9,22.6 14.5,23.5 20,24 -25.9,24.6 -23.1,25 24,25 -12.7,25.7
NetC1_1: C1.1 I1.1 U1.6 | length 5.2
  Top Layer w0.5: U1.6 -15.3,-1.4 I1.1
NetC1_2: C1.2 U1.1 | length 2.3
  Top Layer w0.5: U1.1 -18.6,1.4 C1.2
NetC2_1: C2.1 C3.2 D1.2 D2.2 R1.1 U1.5 | length 18.3
  Top Layer w0.5: U1.5 -21,-2.657 -20.2,-3.457 R1.1 C3.2 -17.8,-12.5 D2.2
  Top Layer w0.8: C2.1 -14.3,-8 D1.2
NetC12_2: C12.2 U3.5 Y1.2 | length 11.4
  Top Layer w0.25: C12.2 -9.9,5.3 Y1.2 -9.5,3.5 -6.75,0.75 U3.5
NetC13_2: C13.2 U3.6 Y1.1 | length 11.8
  Top Layer w0.25: C13.2 Y1.1@-9.9,-5.3 ; Y1.1 -9.5,-2.5 -6.75,0.25 U3.6
NetD1_1: D1.1 F1.2 | length 4.5
  Top Layer w1: D1.1 -13,-14 F1.2
NetD4_1: D4.1 R15.2 | length 2.3
  Top Layer w0.6: R15.2 1.5,-12.2 D4.1
NetD4_2: D4.2 D6.2 R16.2 R17.1 U4.6 | length 24.8
  Top Layer w0.6: D6.2 R17.1@-1,-15.2 ; R16.2 -2.4,-17.3 R17.1 R17.1@-1,-15.2 ; D4.2 -1,-14 v1(-1,-14.6) R17.1@-1,-15.2 ; U4.6 10.365,-9.365 11,-10 v1(11,-11)
  Bottom Layer w0.6: v1(-1,-14.6) 7.4,-14.6 v1(11,-11)
NetD5_2: D5.2 R17.2 R18.2 R19.2 U4.7 | length 23.1
  Top Layer w0.6: R17.2 2.4,-16.3 v1(2.4,-17.15) R18.2 ; U4.7 11.635,-8.935 D5.2 R19.2
  Bottom Layer w0.6: v1(2.4,-17.15) 8.05,-17.15 v1(14.7,-10.5)
NetD9_1: D9.1 Q6.3 | length 8.9
  Top Layer w0.6: Q6.3 5.5,-19.58 D9.1
NetD9_2: D9.2 R27.2 | length 7.2
  Top Layer w0.6: R27.2 12,-20.5 12.5,-21 12.5,-24.04 D9.2
NetD9_3: D9.3 Q7.3 | length 15.2
  Top Layer w0.3: D9.3 16.27,-25.534 17.776,-27.04 20.324,-27.04 21.54,-25.824 21.54,-22.21 Q7.3
NetD9_4: D9.4 R26.2 | length 7.8
  Top Layer w0.6: R26.2 20,-20.8 20,-24.08 D9.4
NetD9_5: D9.5 R25.2 | length 5.1
  Top Layer w0.6: R25.2 16,-19.92 D9.5
NetD9_6: D9.6 Q5.3 | length 14.7
  Top Layer w0.3: D9.6 17.5,-23.96 17.5,-26 18,-26.5 20.1,-26.5 21,-25.6 Q5.3
NetD9_7: D9.7 R24.2 | length 4
  Top Layer w0.6: D9.7 14,-22.46 R24.2
NetD9_8: D9.8 Q4.3 | length 4.9
  Top Layer w0.6: Q4.3 9,-20.54 D9.8
NetQ1_1: Q1.1 U3.10 | length 34.8
  Top Layer w0.25: v2(-6.5,-1.5) -6.25,-1.75 U3.10
  Top Layer w0.6: Q1.1 v2(-17.05,25.95)
  Bottom Layer w0.3: v2(-17.05,25.95) -15,23.9 -15,20.664 -6.5,12.164 v2(-6.5,-1.5)
NetQ2_1: Q2.1 U3.11 | length 31.7
  Top Layer w0.25: v2(-7,-2.2) -6.95,-2.25 U3.11
  Top Layer w0.6: Q2.1 v2(-17.05,21.95)
  Bottom Layer w0.3: v2(-17.05,21.95) -7.19,12.09 -7.19,-2.01 v2(-7,-2.2)
NetQ3_1: Q3.1 U3.12 | length 28.8
  Top Layer w0.25: v2(-7.6,-2.9) -6.7,-2.9 -6.55,-2.75 U3.12
  Top Layer w0.6: Q3.1 v2(-17.05,17.95)
  Bottom Layer w0.3: v2(-17.05,17.95) -7.73,8.63 -7.73,-2.77 v2(-7.6,-2.9)
NetR1_2: R1.2 U1.4 | length 1.9
  Top Layer w0.5: R1.2@-21.95,-3.35 U1.4
NetR2_2: R2.2 R3.1 U1.3 | length 7.1
  Top Layer w0.5: U1.3 -21.95,3.35 R3.1 -21.8,3.7 -21,4.5 -18.8,4.5 R2.2
NetR4_1: R4.1 U3.40 | length 3.1
  Top Layer w0.25: U3.40 1.25,6.75 R4.1
NetR5_1: R5.1 U3.39 | length 3.5
  Top Layer w0.25: U3.39 1.75,5.65 3.2,7.1 R5.1
NetR6_1: R6.1 U3.38 | length 4.3
  Top Layer w0.25: U3.38 2.25,5.457 2.693,5.9 3.4,5.9 R6.1
NetR7_1: R7.1 U3.2 | length 13.9
  Top Layer w0.25: U3.2 0.75,2.25 v2(1.5,1.5)
  Top Layer w0.6: v2(6.2,6) R7.1
  Bottom Layer w0.25: v2(1.5,1.5) 1.7,1.5 v2(6.2,6)
NetR8_1: R8.1 U3.29 | length 11.6
  Top Layer w0.25: U3.29 7.25,-0.75 v2(7.5,-1)
  Top Layer w0.6: v2(7.7,6) R8.1
  Bottom Layer w0.25: v2(7.5,-1) 7.7,-0.8 v2(7.7,6)
NetR9_1: R9.1 U3.28 | length 13.3
  Top Layer w0.25: U3.28 6.75,-1.25 7.3,-1.8 v2(7.8,-1.8)
  Top Layer w0.6: v2(9.2,6) R9.1
  Bottom Layer w0.25: v2(7.8,-1.8) 9.2,-0.4 v2(9.2,6)
NetR10_1: R10.1 U3.27 | length 15
  Top Layer w0.25: U3.27 6.557,-1.75 7.407,-2.6 v2(8.1,-2.6)
  Top Layer w0.6: v2(10.7,6) R10.1
  Bottom Layer w0.25: v2(8.1,-2.6) 10.7,0 v2(10.7,6)
NetR11_1: R11.1 U3.26 | length 16.8
  Top Layer w0.25: U3.26 6.364,-2.25 7.514,-3.4 v2(8.4,-3.4)
  Top Layer w0.6: v2(12.2,6) R11.1
  Bottom Layer w0.25: v2(8.4,-3.4) 12.2,0.4 v2(12.2,6)
NetR12_1: R12.1 U3.25 | length 18.5
  Top Layer w0.25: U3.25 6.171,-2.75 7.621,-4.2 v2(8.7,-4.2)
  Top Layer w0.6: v2(13.8,6) R12.1
  Bottom Layer w0.25: v2(8.7,-4.2) 13.8,0.9 v2(13.8,6)
NetR13_1: R13.1 U3.44 | length 10.8
  Top Layer w0.25: R13.1 -6.7,7.2 v2(-5.5,6) ; v2(-1,7.2) -0.75,6.95 U3.44 -0.755,4.305 -0.755,5.08 -0.76,5.08
  Bottom Layer w0.25: v2(-5.5,6) -4.3,7.2 v2(-1,7.2)
NetR14_1: R14.1 U3.20 | length 10.4
  Top Layer w0.25: R14.1 -6.6,-7 v2(-3,-7) ; U3.20 v2(0.75,-3.15)
  Bottom Layer w0.25: v2(-3,-7) -3,-6.9 v2(0.75,-3.15)
NRST: C14.2 P3.5 U3.7 | length 28.5
  Top Layer w0.25: U3.7 v2(1.45,-0.25)
  Top Layer w0.3: v2(7,2) 20.7,2 C14.2 P3.5
  Bottom Layer w0.25: v2(1.45,-0.25) 3.7,2 v2(7,2)
R: P2.4 Q3.3 | length 15.1
  Top Layer w0.6: Q3.3 -13.43,18.82 -7.696,18.82 -6.5,17.624 P2.4
SWCLK: P3.2 U3.37 | length 21.7
  Top Layer w0.25: U3.37 2.75,4.75 3.335,5.335 14.295,5.335 P3.2
SWDIO: P3.4 U3.34 | length 18.9
  Top Layer w0.25: U3.34 5.75,1.75 6.7,2.7 16.74,2.7 P3.4
备用1: P2.7 U3.46 | length 8.5
  Top Layer w0.25: P2.7 -3.5,7.993 -1.755,6.248 U3.46@-1.755,4.7
备用2: P2.8 U3.45 | length 8.7
  Top Layer w0.25: P2.8 -2.5,7.686 -1.25,6.436 U3.45
按键+: S2.1 U3.3 | length 54.5
  Top Layer w0.25: v2(-5.8,2.44) -5.135,1.775 -5.135,1.75 U3.3 ; v2(-4,-21) -4,-25.5 -2.79,-26.71 14.96,-26.71 S2.1
  Bottom Layer w0.25: v2(-5.8,2.44) -5.135,1.775 -5.135,-3.335 -6.5,-4.7 -6.5,-18.5 v2(-4,-21)
按键-: S1.1 U3.4 | length 44.6
  Top Layer w0.25: v2@-5.8,1.4 -5.65,1.25 U3.4 ; v2(-5,-21.5) -4.49,-22.01 -4.49,-25.703 -2.993,-27.2 6.45,-27.2 S1.1
  Bottom Layer w0.25: v2(-5.8,1.5) -5.8,-3.307 -6.99,-4.497 -6.99,-19.51 v2(-5,-21.5)
触摸-INT: P2.11 U3.41 | length 8.3
  Top Layer w0.25: P2.11 0.5,11 0.75,10.75 U3.41
触摸-SCL: P2.10 R20.1 U3.42 | length 27.1
  Top Layer w0.25: P2.10 -0.5,11.307 0.25,10.557 U3.42
  Top Layer w0.4: P2.10 -0.5,14 4,18.5 R20.1
触摸-SDA: P2.9 R21.1 U3.43 | length 29.4
  Top Layer w0.25: P2.9 -1.5,11.614 -0.25,10.364 U3.43
  Top Layer w0.4: P2.9 -1.5,14.5 4.5,20.5 R21.1
pads on no net: N1.1 N2.1

## Polygon pours and split planes (outlines as drawn)
GND on Top Layer "Bottom Layer-No Net" (solid, remove dead copper, pour order 8): -26.7,27.2 -27.2,26.7 -27.2,-30 -25.2,-32 -25,-32 25.2,-32 27.2,-30 27.2,26.7 26.7,27.2
GND on Bottom Layer "Bottom Layer-No Net" (solid, remove dead copper, pour order 10): -26.7,27.2 -27.2,26.7 -27.2,-30 -25.2,-32 -25,-32 25.2,-32 27.2,-30 27.2,26.7 26.7,27.2

## Keep-outs
Keep-Out Layer:
  circle w0.1: c25.2,10.1 r1
  circle w0.1: c-25.2,-10.1 r1
  circle w0.1: c25.2,-10.1 r1
  lines w0.1: -27.199,8.541 cw(c-29.5,3) -23.5,3 -23.5,-3 cw(c-29.5,-3) -27.199,-8.541 -27.2,-30 -25.5,-30 cw(c-25.5,-30.5) -25,-30.5 -25,-32 25,-32 25,-30.5 cw(c25.5,-30.5) 25.5,-30 27.2,-30 27.2,-8.541 cw(c29.5,-3) 23.5,-3 23.5,3 cw(c29.5,3) 27.199,8.541 ; -27.2,8.543 -27.2,26.7 -26.7,27.2 -12,27.2 cw(c-12,26.2) -11,26.2 -11,23 ccw(c-10,23) -10,22 10,22 ccw(c10,23) 11,23 11,26.2 cw(c12,26.2) 12,27.2 26.7,27.2 27.2,26.7 27.2,8.543

## Other copper
Top Layer:
  region net GND: 9,-32 9,-31 8.5,-30.5 8,-30.5 7.5,-30 7.5,-29.284 6.147,-27.931 3.5,-30.578 3.5,-32
  region net GND: 21,-32 21,-29.97 20.492,-29.462 20.492,-28.008 21,-27.5 27.2,-27.5 27.2,-30 25,-30 25,-32
  region net GND: 10.5,-30 12,-30 12.5,-30.5 12.5,-32 18,-32 18,-31 17.5,-30.5 17,-30.5 16.291,-29.791 16.291,-29.075 15.105,-27.889 13.155,-27.889 13.026,-27.76 11.74,-27.76 11.5,-28

## Silkscreen, mask and mechanical layers (free items; w line width, h text height)
Top Overlay:
  circle w0.1: c-25.2,-10.1 r2
  circle w0.1: c25.2,-10.1 r2
  circle w0.1: c25.2,10.1 r2
  region: 8.6,-27.1 7,-27.1 7,-27.7 8.6,-27.7
  region: 22.5,-28.2 22.5,-26.6 21.9,-26.6 21.9,-28.2
  rectangle: 21.4,-27.7 23,-27.1
  text "3.3V" at 15.8,13.9 h2
  text "SWCLK" at 14.7,11.4 h2
  text "GND" at 16.7,8.9 h2
  text "SWDIO" at 14.7,6.2 h2
  text "NRST" at 15.7,3.6 h2
  text "9-24V" at -24,-31.4 h1.6
  text "CAN-H" at -19.1,-31.4 h1.6
  text "CAN-L" at -14,-31.4 h1.6
  text "GND" at -8.2,-31.4 h1.6
  text "A" at -2.5,-31.4 h1.6
  text "B" at 2.6,-31.4 h1.6
Bottom Overlay:
  drawing of 774 lines, arcs and shapes, not listed
Mechanical 15:
  lines w0.1: 15,-34.4 15,-24.4
  lines w0.2: -41.312,-98.116 46.688,-98.116 ; -41.312,-92.116 46.688,-92.116 ; -41.312,-86.116 46.688,-86.116 ; -41.312,-80.116 46.688,-80.116 ; -41.312,-74.116 46.688,-74.116 ; -41.312,-68.116 46.688,-68.116 ; -41.312,-62.116 46.688,-62.116 ; -19.312,-104.116 -19.312,-56.116 -19.312,-50.116 ; -41.312,-56.116 -41.312,-50.116 46.688,-50.116 46.688,-56.116 ; -41.312,-56.116 46.688,-56.116 ; -41.312,-56.116 -41.312,-104.116 46.688,-104.116 46.688,-56.116
  text "公司" at -40.312,-55.116 h5
  text "杭州久天科技有限公司" at -16.312,-55.116 h5
  text "工程" at -40.312,-61.116 h5
  text "设计" at -40.312,-67.116 h5
  text "邵宁鹏" at -16.312,-67.116 h5
  text "日期" at -40.312,-73.116 h5
  text "板厚" at -40.312,-79.116 h5
  text "1.2mm" at -16.324,-79.1 h5
  text "阻焊油" at -40.312,-85.116 h5
  text "绿色" at -16.312,-85.116 h5
  text "丝印" at -40.312,-91.116 h5
  text "白色" at -16.312,-91.116 h5
  text "板材" at -40.312,-97.116 h5
  text "FR-4" at -16.312,-97.116 h5
  text "其他" at -40.312,-103.116 h5
  text "有铅喷锡，过孔盖油" at -16.312,-103.116 h5

## Dimensions
25,-32 to 26.7,27.2 on Mechanical 15
-27.2,-30 to 27.2,-30 on Mechanical 15

## Text inside footprints (layer, text, board x,y; h text height)
D9: Top Overlay "188" at 13.5,-27.7 h2